# Altium PCB Jukebox_old.PCBDOC (part 1 of 3)
Units mil, origin at the board's own origin, x right, y up, seen from the top; angles counter-clockwise.
Board outline 8310.03 x 5810.03 mil, 2 copper layers (Top Layer, Bottom Layer); 157 components, 236 nets, 1178 pads, 372 vias.
Unrouted connection lines stored in the file: 26.
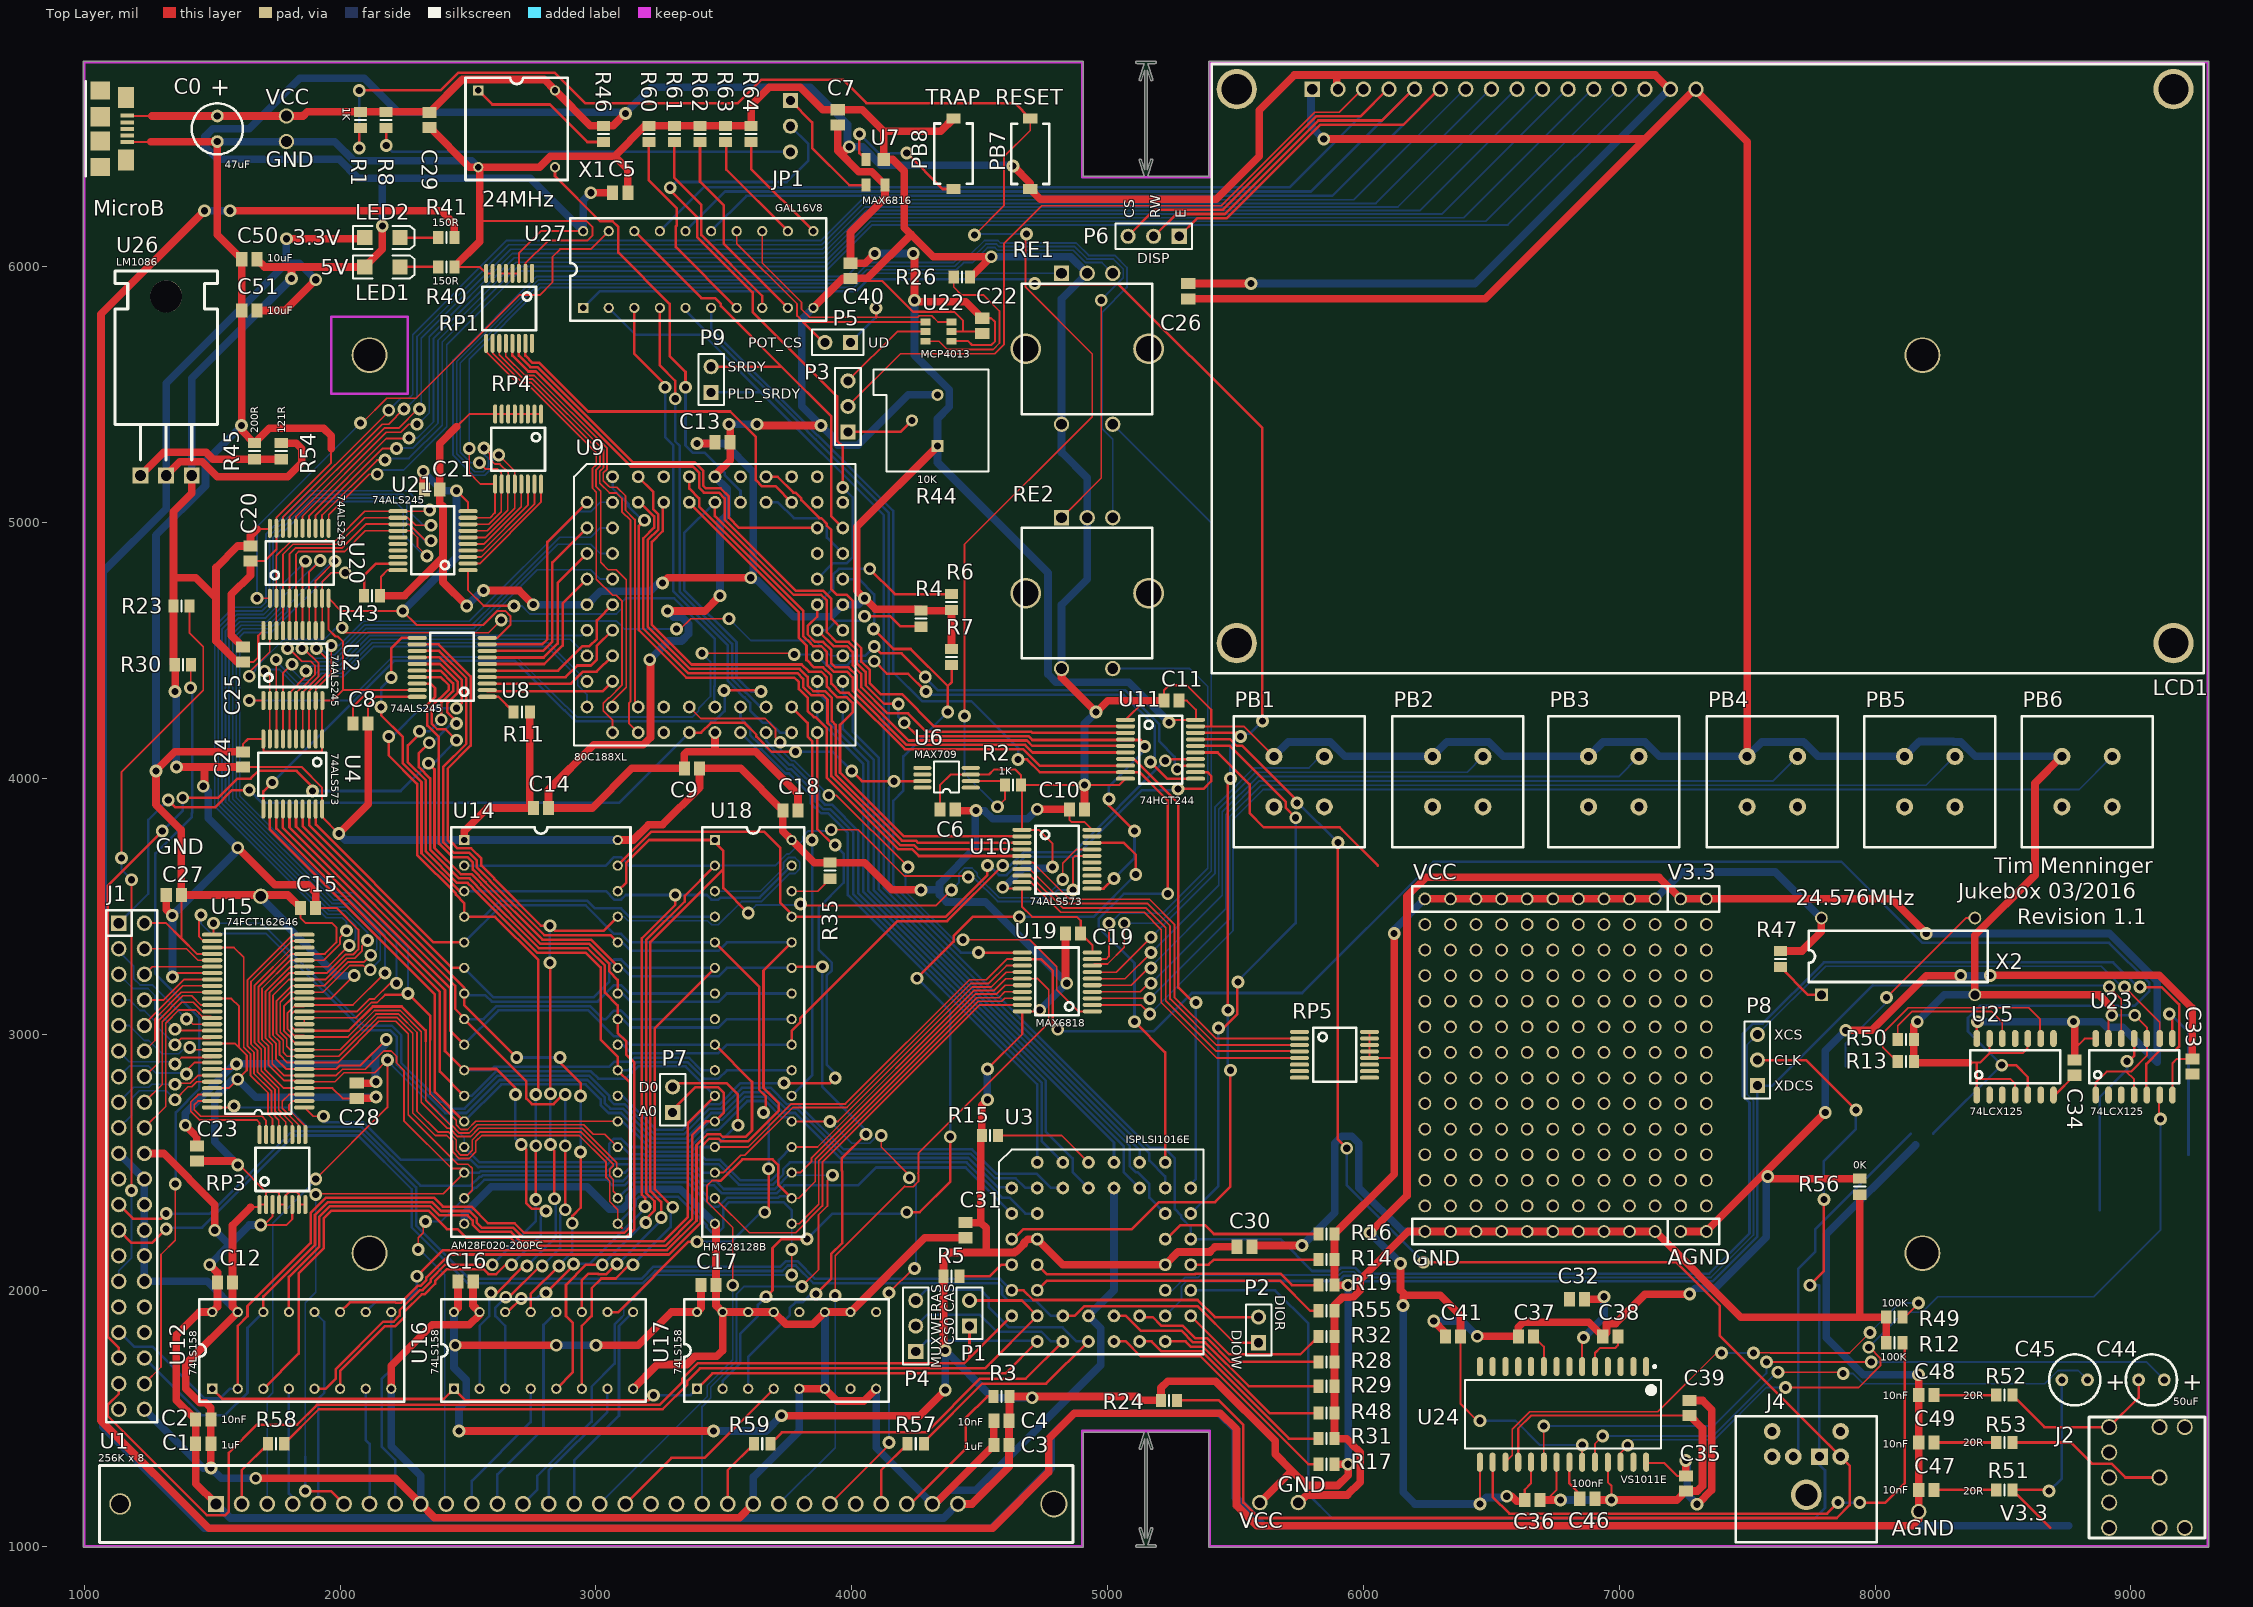
[diagram p0: Top Layer view]
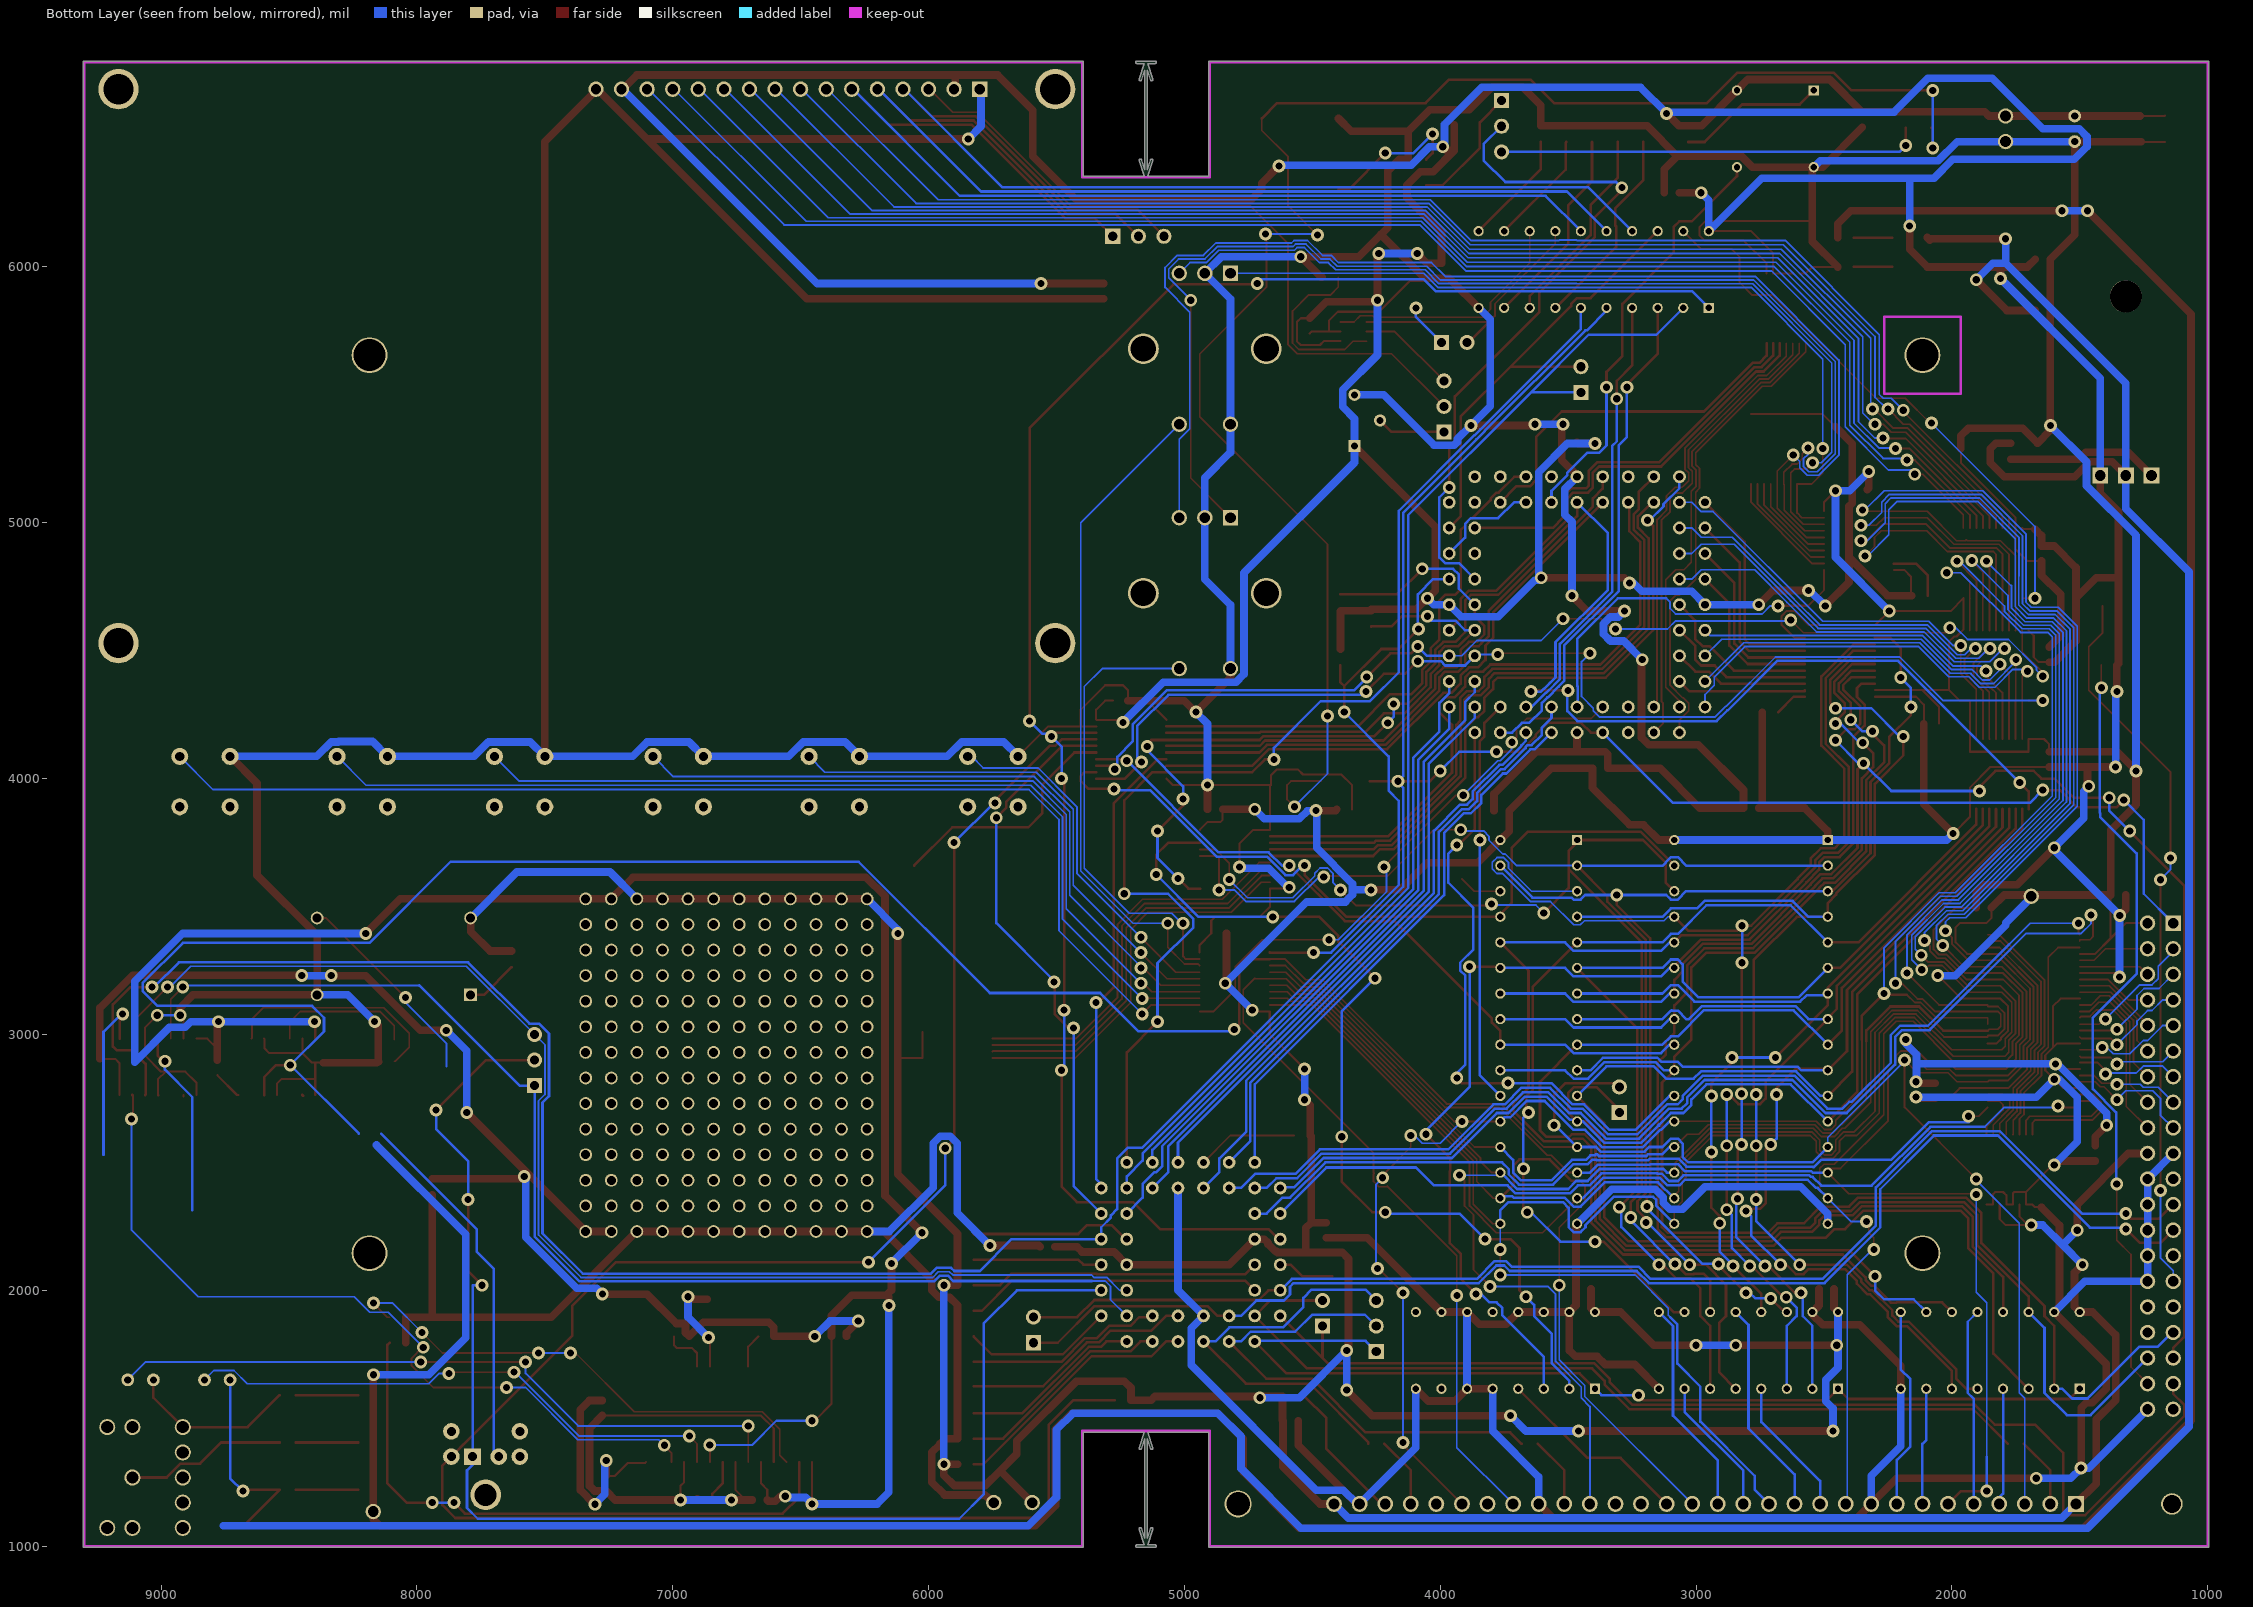
[diagram p1: Bottom Layer view, seen from below]

## Layer stack, top to bottom
Top Solder: solder mask 0.4, Solder Resist, Dk 3.5
Top Layer: signal copper 1.4
Dielectric1: dielectric 12.6, FR-4, Dk 4.8
Bottom Layer: signal copper 1.4
Bottom Solder: solder mask 0.4, Solder Resist, Dk 3.5

## Board outline
1000,994.99 cw(c1000,1000) 994.99,1000 994.99,6800 cw(c1000,6800) 1000,6805.02 4900,6805.02 cw(c4900,6800) 4905.02,6800 4905.02,6355.02 5143.04,6355.02 5122.95,6415.29 cw(c5127.71,6416.87) 5132.47,6418.46 5144.98,6380.9 5144.98,6769.1 5132.47,6731.54 cw(c5127.71,6733.13) 5122.95,6734.71 5143.04,6794.98 5115,6794.98 cw(c5115,6800) 5115,6805.02 5185,6805.02 cw(c5185,6800) 5190.02,6800 cw(c5185,6800) 5185,6794.98 5156.96,6794.98 5177.05,6734.71 cw(c5172.29,6733.13) 5177.31,6733.13 cw(c5172.29,6733.13) 5167.53,6731.54 5155.02,6769.1 5155.02,6380.9 5167.53,6418.46 cw(c5172.29,6416.87) 5177.31,6416.87 cw(c5172.29,6416.87) 5177.05,6415.29 5156.96,6355.02 5394.98,6355.02 5394.98,6800 cw(c5400,6800) 5400,6805.02 9300,6805.02 cw(c9300,6800) 9305.01,6800 9305.01,1000 cw(c9300,1000) 9300,994.99 5400,994.99 cw(c5400,1000) 5394.98,1000 5394.98,1444.98 5156.96,1444.98 5177.05,1384.71 cw(c5172.29,1383.13) 5177.31,1383.13 cw(c5172.29,1383.13) 5167.53,1381.54 5155.02,1419.1 5155.02,1030.9 5167.53,1068.46 cw(c5172.29,1066.87) 5177.31,1066.87 cw(c5172.29,1066.87) 5177.05,1065.29 5156.96,1005.01 5185,1005.01 cw(c5185,1000) 5190.02,1000 cw(c5185,1000) 5185,994.99 5115,994.99 cw(c5115,1000) 5115,1005.01 5143.04,1005.01 5122.95,1065.29 cw(c5127.71,1066.87) 5132.47,1068.46 5144.98,1030.9 5144.98,1419.1 5132.47,1381.54 cw(c5127.71,1383.13) 5122.95,1384.71 5143.04,1444.98 4905.02,1444.98 4905.02,1000 cw(c4900,1000) 4900,994.99

## Design rules (kind name [scope] priority, off if disabled: settings)
Clearance Clearance_11 [HasFootprint('TSSOP56')] p1: gap=7
Clearance Clearance_9 [IsSMTPin vs IsFill] p2: gap=7.9
Clearance Clearance_8 [IsSMTPin vs IsVia] p3: gap=7.9
Clearance Clearance_7 [IsSMTPin vs IsSMTPin] p4: gap=7.8
Clearance Clearance_6 [IsThruPin vs IsFill] p5: gap=7.9
Clearance Clearance_5 [IsThruPin vs IsVia] p6: gap=7.9
Clearance Clearance_4 [IsThruPin vs IsSMTPin] p7: gap=7.8
Clearance Clearance_3 [IsThruPin vs IsThruPin] p8: gap=7.8
Clearance Clearance_2 [IsWire vs IsSMTPin] p9: gap=7.9
Clearance Clearance_1 [IsWire vs IsThruPin] p10: gap=7.9
Clearance [All] p11 off: gap=10
Clearance Clearance_10 [All] p12: gap=7
FabricationTestPointUsage TestPointUsage [All] p1: valid=0 allowmultiple=FALSE
FabricationTestpoint Testpoint [All] p1: side=3 testpointundercomponent=TRUE minsize=40 maxsize=100 preferedsize=60 minholesize=0 maxholesize=40 preferedholesize=32 testpointgrid=1 allowsidetop=TRUE allowsidebottom=TRUE usegrid=TRUE gridtolerance=0.01
HoleSize [All] p1: absolutevalues=TRUE maxlimit=200 minlimit=1 maxpercent=80.000 minpercent=20.000
PlaneClearance [All] p1: clearance=10
PolygonConnect [All] p1: connectstyle=Relief reliefconductorwidth=10 reliefentries=4 polygonreliefangle="90 Angle" airgapwidth=10
RoutingVias [All] p1: holewidth=28 width=50 viastyle="Through Hole" minholewidth=28 minwidth=50 maxholewidth=28 maxwidth=50
SMDNeckDown [All] p1: percent=95.000
SolderMaskExpansion [All] p1: expansion=2
UnpouredPolygon [All] p1: allowunpoured=FALSE
Width [InNet('NetR45_1')] p1: maxlimit=30 minlimit=7 preferedwidth=30 minimp=50.000000 maximp=50.000000 favimp=50.000000
Width "Schematic Width Constraint_3" [InNet('VCC')] p2: maxlimit=30 minlimit=8 preferedwidth=30
Width "Schematic Width Constraint_2" [InNet('GND')] p3: maxlimit=30 minlimit=8 preferedwidth=30
Width "Schematic Width Constraint_1" [InNet('V3.3')] p4: maxlimit=30 minlimit=8 preferedwidth=30
Width "Schematic Width Constraint" [InNet('AGND')] p5: maxlimit=30 minlimit=8 preferedwidth=30
Width Width_1 [All] p6: maxlimit=10 minlimit=7 preferedwidth=10 minimp=50.000000 maximp=50.000000 favimp=50.000000
25 further rules are at their usual default settings.

## Classes and differential pairs
net class D[0..7]: D0 D1 D2 D3 D4 D5 D6 D7
net class A[0..19]: A0 A1 A2 A3 A4 A5 A6 A7 A8 A9 A10 A11 A12 A13 A14 A15 A16 A17 A18 A19
component class "Jukebox Processing": JP1 P1 P2 P4 P5 P6 P7 P8 P9 PB7 PB8 R1 R2 R4 R5 R6 R7 R8 R11 R14 R15 R16 R17 R19 R28 R29 R31 R32 R46 R48 R55 R60 R61 R62 R63 R64 RP1 RP5 U2 U3 U4 U6 U7 U8 U9 U10 U11 U27 X1
component class "Jukebox Power": C0 C1 C2 C3 C4 C5 C6 C7 C8 C9 C10 C11 C12 C13 C14 C15 C16 C17 C18 C19 C20 C21 C22 C23 C24 C25 C26 C27 C28 C29 C30 C31 C32 C33 C34 C35 C36 C37 C38 C39 C40 C41 C50 C51 LED1 LED2 MicroB R40 R41 R45 R54 R56 U26
component class "Jukebox Peripherals": C44 C45 C46 C47 C48 C49 J2 J4 LCD1 P3 PB1 PB2 PB3 PB4 PB5 PB6 R12 R13 R24 R26 R43 R44 R47 R49 R50 R51 R52 R53 RE1 RE2 RP4 U19 U20 U21 U22 U23 U24 U25 X2
component class "Jukebox Memory": J1 R3 R23 R30 R35 R57 R58 R59 RP3 U1 U12 U14 U15 U16 U17 U18

## Components (designator, comment, footprint, x,y, rotation, side; value= is the part's Value field where it differs from the comment)
C0 "Cap Pol3" RB.1/.2 1520,6490 r90 top
C1 "Cap Pol3" C0805 1465,1400 r0 top
C2 "Cap" C0805 1465,1495 r180 top
C3 "Cap Pol3" C0805 4585,1395 r180 top
C4 "Cap" C0805 4585,1490 r0 top
C5 "Cap" C0805 3095,6290 r180 top
C6 "Cap" C0805 4375,3880 r0 top
C7 "Cap" C0805 3945,6585 r270 top
C8 "Cap" C0805 2080,4215 r0 top
C9 "Cap" C0805 3375,4040 r0 top
C10 "Cap" C0805 4880,3880 r180 top
C11 "Cap" C0805 5250,4305 r0 top
C12 "Cap" C0805 1550,2030 r180 top
C13 "Cap" C0805 3495,5315 r180 top
C14 "Cap" C0805 2785,3885 r180 top
C15 "Cap" C0805 1875,3495 r0 top
C16 "Cap" C0805 2490.96,2035 r180 top
C17 "Cap" C0805 3440,2020 r180 top
C18 "Cap" C0805 3760,3875 r180 top
C19 "Cap" C0805 4865,3395 r180 top
C20 "Cap" C0805 1650,4880 r90 top
C21 "Cap" C0805 2360,5130 r0 top
C22 "Cap" C0805 4510,5770 r90 top
C23 "Cap" C0805 1440,2535 r90 top
C24 "Cap" C0805 1620,4075 r270 top
C25 "Cap" C0805 1620,4485 r270 top
C26 "Cap" C0805 5315,5905 r90 top
C27 "Cap" C0805 1350,3545 r180 top
C28 "Cap" C0805 2065,2780 r90 top
C29 "Cap" C0805 2350,6575 r90 top
C30 "Cap" C0805 5535,2170 r180 top
C31 "Cap" C0805 4445,2235 r90 top
C32 "Cap" C0805 6835,1965 r180 top
C33 "Cap" C0805 9240,2875 r270 top
C34 "Cap" C0805 8780,2870 r90 top
C35 "Cap" C0805 7260,1245 r90 top
C36 "Cap" C0805 6660,1180 r180 top
C37 "Cap" C0805 6635,1820 r0 top
C38 "Cap" C0805 6965,1820 r0 top
C39 "Cap" C0805 7275,1540 r90 top
C40 "Cap" C0805 3995,5985 r90 top
C41 "Cap" C0805 6350,1820 r0 top
C44 "Cap Pol3" RB.1/.2 9030,1650 r0 top
C45 "Cap Pol3" RB.1/.2 8730,1650 r0 top
C46 "Cap" C0805 6875,1185 r0 top
C47 "Cap" C0805 8200,1220 r180 top
C48 "Cap" C0805 8200,1590 r180 top
C49 "Cap" C0805 8200,1405 r180 top
C50 "Cap Pol3" C0805 1645,6030 r180 top
C51 "Cap Pol3" C0805 1645,5830 r180 top
J1 "IDE40" SIP2X20 1135,3435 r270 top
J2 "PHONEJACK STEREO SW" SJ1-352 8915,1465 r0 top
J4 "CON_MP3" MDIN6 7865,1350 r180 top
JP1 "3P_JP" HDR1X3 3760,6650 r270 top
LCD1 "NHD-0420DZ-FSW-FBW" 20x4Disp 5800,6695 r0 top
LED1 "5V PWR" 3.2X1.6X1.1 2165,6000 r0 top
LED2 "3.3V PWR" 3.2X1.6X1.1 2165,6115 r0 top
MicroB "Micro B" 10118192 1025,6725 r270 top
P1 "Header 2" HDR1X2 4460,1860 r90 top
P2 "Header 2" HDR1X2 5590,1795 r90 top
P3 "Header 3" HDR1X3 3985,5355 r90 top
P4 "Header 3" HDR1X3 4250,1760 r90 top
P5 "Header 2" HDR1X2 3995,5705 r180 top
P6 "Header 3" HDR1X3 5280,6120 r180 top
P7 "Header 2" HDR1X2 3300,2695 r90 top
P8 "Header 3" HDR1X3 7540,2800 r90 top
P9 "Header 2" HDR1X2 3450,5510 r90 top
PB1 "SW-PB" PB_EG4791 5650,3890 r0 top
PB2 "SW-PB" PB_EG4791 6270,3890 r0 top
PB3 "SW-PB" PB_EG4791 6880,3890 r0 top
PB4 "SW-PB" PB_EG4791 7500,3890 r0 top
PB5 "SW-PB" PB_EG4791 8115,3890 r0 top
PB6 "SW-PB" PB_EG4791 8730,3890 r0 top
PB7 "SWITCH-PBNC" KSR_PB_NC 4725,6285 r90 top
PB8 "SW-PB" KSR_PB_NC 4370,6600 r270 top
R1 "Res1" 6-0805_L 2080,6575 r270 top
R2 "Res1" 6-0805_L 4630,3975 r0 top
R3 "Res1" 6-0805_L 4585,1585 r0 top
R4 "Res1" 6-0805_L 4270,4625 r90 top
R5 "Res1" 6-0805_L 4390,2055 r0 top
R6 "Res1" 6-0805_L 4390,4690 r270 top
R7 "Res1" 6-0805_L 4390,4475 r90 top
R8 "Res1" 6-0805_L 2180,6575 r90 top
R11 "Res1" 6-0805_L 2710,4260 r180 top
R12 "Res1" 6-0805_L 8075,1795 r0 top
R13 "Res1" 6-0805_L 8120,2895 r180 top
R14 "Res1" 6-0805_L 5855,2120 r180 top
R15 "Res1" 6-0805_L 4540,2605 r0 top
R16 "Res1" 6-0805_L 5855,2220 r180 top
R17 "Res1" 6-0805_L 5855,1320 r180 top
R19 "Res1" 6-0805_L 5855,2020 r180 top
R23 "Res1" 6-0805_L 1380,4675 r180 top
R24 "Res1" 6-0805_L 5240,1570 r0 top
R26 "Res1" 6-0805_L 4430,5960 r0 top
R28 "Res1" 6-0805_L 5855,1720 r0 top
R29 "Res1" 6-0805_L 5855,1625 r0 top
R30 "Res1" 6-0805_L 1385,4445 r180 top
R31 "Res1" 6-0805_L 5855,1420 r0 top
R32 "Res1" 6-0805_L 5855,1820 r0 top
R35 "Res1" 6-0805_L 3915,3640 r90 top
R40 "Res1" 6-0805_L 2415,6000 r180 top
R41 "Res1" 6-0805_L 2415,6115 r180 top
R43 "Res1" 6-0805_L 2125,4715 r180 top
R44 "RPot" VR4 4285,5400 r90 top
R45 "Res1" 6-0805_L 1665,5280 r90 top
R46 "Res1" 6-0805_L 3030,6520 r270 top
R47 "Res1" 6-0805_L 7630,3295 r270 top
R48 "Res1" 6-0805_L 5855,1520 r0 top
R49 "Res1" 6-0805_L 8075,1895 r0 top
R50 "Res1" 6-0805_L 8120,2980 r180 top
R51 "Res1" 6-0805_L 8505,1220 r0 top
R52 "Res1" 6-0805_L 8505,1590 r0 top
R53 "Res1" 6-0805_L 8505,1405 r0 top
R54 "Res1" 6-0805_L 1770,5280 r90 top
R55 "Res1" 6-0805_L 5855,1920 r0 top
R56 "Res1" 6-0805_L 7940,2405 r270 top
R57 "Res1" 6-0805_L 4250,1400 r0 top
R58 "Res1" 6-0805_L 1750,1400 r0 top
R59 "Res1" 6-0805_L 3650,1400 r0 top
R60 "Res1" 6-0805_L 3206.65,6520 r270 top
R61 "Res1" 6-0805_L 3306.65,6520 r270 top
R62 "Res1" 6-0805_L 3406.65,6520 r270 top
R63 "Res1" 6-0805_L 3506.65,6520 r90 top
R64 "Res1" 6-0805_L 3606.65,6520 r90 top
RE1 "SW-ROTARY&PB" ROTENCPB 4820,5975 r0 top
RE2 "SW-ROTARY&PB" ROTENCPB 4820,5020 r0 top
RP1 "10K" SSOP16 2750,5975 r180 top
RP3 "10K" SSOP16 1685,2335 r0 top
RP4 "10K" SSOP16 2785,5425 r180 top
RP5 "10K" SSOP16 5750,3010 r270 top
U1 "DRAM256KX9" SIMM30 1515,1165 r0 top
U2 "74ALS245" SSOP20 1700,4305 r0 top
U3 "ISPLSI1016E" PLCCS44 4625,2500 r0 top
U4 "74ALS573" SSOP20 1930,4155 r180 top
U6 "MAX709" UMAX8 4465,3965 r180 top
U7 "MAX6816" SOT-143 4125,6420 r180 top
U8 "74ALS245" SSOP20 2575,4320 r90 top
U9 "80C188XL" PLCCS68I 2965,5180 r0 top
U10 "74ALS573" SSOP20 4665,3800 r270 top
U11 "74HCT244" SSOP20 5070,4230 r270 top
U12 "74LS158" DIPS16 1500,1615 r90 top
U14 "AM28F020-200PC" DIPS32 2485,3760 r0 top
U15 "74FCT162646" SSOP56 1860,2715 r180 top
U16 "74LS158" DIPS16 2445,1615 r90 top
U17 "74LS158" DIPS16 3395,1615 r90 top
U18 "HM628128B" DIPS32.300 3465,3760 r0 top
U19 "MAX6818" SSOP20 4940,3090 r90 top
U20 "74ALS245" SSOP20 1725,4705 r0 top
U21 "74ALS245" SSOP20 2500,4815 r90 top
U22 "MCP4013" SOT-23-6 4390,5710 r90 top
U23 "74LCX125" "SOIC 14" 9175,2730 r90 top
U24 "VS1011E" SOP127P1030X265-28N 6780,1515 r270 top
U25 "74LCX125" "SOIC 14" 8710,2730 r90 top
U26 "LM1086" TO-220 1220,5185 r0 top
U27 "GAL16V8" DIPS20 2950,5840 r90 top
X1 "OSCOE" DIPS8-4 2540,6690 r0 top
X2 "OSCOE" DIP14-4 7790,3155 r90 top

## Footprints (in the part's own frame and the unit in brackets; to place one, negate y for a bottom-side part, rotate by r counter-clockwise, add the part's x,y. Pads: shape width x height; smd on the part's side, far side on the other; paste and mask are expansions set on the pad)
3.2X1.6X1.1 [mm] "SMT LED; 2 Flat Leads"
  rect 1.5x1.5 smd: 1(-1.75,0) 2(1.75,0)
  silkscreen extent -2.9,-1.15 3.2,1.15
6-0805_L [mm] "Chip Resistor, Body 2.0x1.2mm, IPC High Density"
  rect 1x1.3 smd: 1(-0.8,0) 2(0.8,0)
  silkscreen extent 0,-0.55 0,0.55, body extent -1.07,-0.7 1.07,0.7, height 0.7
20x4Disp [mil]
  round 157.48 hole 118.11: 0(-295.28,-2165.35) 0(-295.28,0) 0(3366.14,-2165.35) 0(3366.14,0)
  rect 60x60 hole 40: 1(0,0)
  round 60 hole 40: 2(100,0) 3(200,0) 4(300,0) 5(400,0) 6(500,0) 7(600,0) 8(700,0) 9(800,0) 10(900,0) 11(1000,0) 12(1100,0) 13(1200,0) 14(1300,0) 15(1400,0) 16(1500,0)
  silkscreen extent -394,-2283 3484,98
10118192 [mm] "Micro B USB"
  rect 0.4x1.35 smd: 1(3.4,3.625) 2(4.05,3.625) 3(4.7,3.625) 4(5.35,3.625) 5(6,3.625)
  rect 1.8x1.9 smd: ""(0.9,0.95) ""(8.5,0.95)
  rect 2.1x1.6 smd: ""(1.6,3.5) ""(7.8,3.5)
  rect 1.9x1.9 smd: ""(3.5,0.95) ""(5.9,0.95)
  silkscreen extent 0,-0.5 9.4,-0.5
C0805 [mm] "Chip Capacitor, Body 2.0x1.3mm, IPC High Density"
  rect 1.1x1.4 smd: 1(-0.75,0) 2(0.75,0)
  body extent -1.1,-0.72 1.1,0.72, height 1.4
DIP14-4 [mil]
  rect 50x50 hole 35: 1(0,0)
  round 50 hole 35: 2(0,-600) 3(300,-600) 4(300,0)
  silkscreen extent 50,-650 250,50
DIPS8-4 [mil]
  rect 40x40 hole 25: 1(0,0)
  round 40 hole 25: 2(0,-300) 3(300,-300) 4(300,0)
  silkscreen extent -50,-350 350,50
DIPS16 [mil]
  rect 40x40 hole 25: 1(0,0)
  round 40 hole 25: 2(0,-100) 3(0,-200) 4(0,-300) 5(0,-400) 6(0,-500) 7(0,-600) 8(0,-700) 9(300,-700) 10(300,-600) 11(300,-500) 12(300,-400) 13(300,-300) 14(300,-200) 15(300,-100) 16(300,0)
  silkscreen extent -50,-750 350,50
DIPS20 [mil]
  rect 40x40 hole 25: 1(0,0)
  round 40 hole 25: 2(0,-100) 3(0,-200) 4(0,-300) 5(0,-400) 6(0,-500) 7(0,-600) 8(0,-700) 9(0,-800) 10(0,-900) 11(300,-900) 12(300,-800) 13(300,-700) 14(300,-600) 15(300,-500) 16(300,-400) 17(300,-300) 18(300,-200) 19(300,-100) 20(300,0)
  silkscreen extent -50,-950 350,50
DIPS32 [mil]
  rect 40x40 hole 25: 1(0,0)
  round 40 hole 25: 2(0,-100) 3(0,-200) 4(0,-300) 5(0,-400) 6(0,-500) 7(0,-600) 8(0,-700) 9(0,-800) 10(0,-900) 11(0,-1000) 12(0,-1100) 13(0,-1200) 14(0,-1300) 15(0,-1400) 16(0,-1500) 17(600,-1500) 18(600,-1400) 19(600,-1300) 20(600,-1200) 21(600,-1100) 22(600,-1000) 23(600,-900) 24(600,-800) 25(600,-700) 26(600,-600) 27(600,-500) 28(600,-400) 29(600,-300) 30(600,-200) 31(600,-100) 32(600,0)
  silkscreen extent -50,-1550 650,50
DIPS32.300 [mil]
  rect 40x40 hole 25: 1(0,0)
  round 40 hole 25: 2(0,-100) 3(0,-200) 4(0,-300) 5(0,-400) 6(0,-500) 7(0,-600) 8(0,-700) 9(0,-800) 10(0,-900) 11(0,-1000) 12(0,-1100) 13(0,-1200) 14(0,-1300) 15(0,-1400) 16(0,-1500) 17(300,-1500) 18(300,-1400) 19(300,-1300) 20(300,-1200) 21(300,-1100) 22(300,-1000) 23(300,-900) 24(300,-800) 25(300,-700) 26(300,-600) 27(300,-500) 28(300,-400) 29(300,-300) 30(300,-200) 31(300,-100) 32(300,0)
  silkscreen extent -50,-1550 350,50
HDR1X2 [mm] "Connector; Header; 2 Position"
  rect 1.5x1.5 hole 0.9: 1(0,0)
  round 1.5 hole 0.9: 2(2.54,0)
  silkscreen extent -1.27,-1.27 3.81,1.27
HDR1X3 [mm] "Connector; Header; 3 Position"
  rect 1.5x1.5 hole 0.9: 1(0,0)
  round 1.5 hole 0.9: 2(2.54,0) 3(5.08,0)
KSR_PB_NC [mm] "Pushbutton SPST NC"
  rect 1x1.4 smd: 1(0.5,0.7) 2(7.5,0.7)
  silkscreen extent 1,-1.2 7,2.6
MDIN6 [mil]
  rect 65x65 hole 35: 1(82.68,0)
  round 65 hole 35: 2(185.04,0) 3(0,0) 4(267.72,0) 5(0,-98.43) 6(267.72,-98.43)
  round 120 hole 86: A(133.86,149.61)
  silkscreen extent -142,-157 409,335
PB_EG4791 [mm]
  round 1.7 hole 0.9: 1(0,5) 2(5,5) 3(0,0) 4(5,0)
  silkscreen extent -4,-4 9,9
PLCCS44 [mil]
  round 50 hole 28: 1(400,-100) 2(300,0) 3(300,-100) 4(200,0) 5(200,-100) 6(100,0) 7(0,-100) 8(100,-100) 9(0,-200) 10(100,-200) 11(0,-300) 12(100,-300) 13(0,-400) 14(100,-400) 15(0,-500) 16(100,-500) 17(0,-600) 18(100,-700) 19(100,-600) 20(200,-700) 21(200,-600) 22(300,-700) 23(300,-600) 24(400,-700) 25(400,-600) 26(500,-700) 27(500,-600) 28(600,-700) 29(700,-600) 30(600,-600) 31(700,-500) 32(600,-500) 33(700,-400) 34(600,-400) 35(700,-300) 36(600,-300) 37(700,-200) 38(600,-200) 39(700,-100) 40(600,0) 41(600,-100) 42(500,0) 43(500,-100) 44(400,0)
  silkscreen extent -50,-750 750,50
PLCCS68I [mil]
  round 50 hole 30: 1(0,-100) 2(100,-100) 3(0,-200) 4(100,-200) 5(0,-300) 6(100,-300) 7(0,-400) 8(100,-400) 9(0,-500) 10(100,-500) 11(0,-600) 12(100,-600) 13(0,-700) 14(100,-700) 15(0,-800) 16(100,-800) 17(0,-900) 18(100,-1000) 19(100,-900) 20(200,-1000) 21(200,-900) 22(300,-1000) 23(300,-900) 24(400,-1000) 25(400,-900) 26(500,-1000) 27(500,-900) 28(600,-1000) 29(600,-900) 30(700,-1000) 31(700,-900) 32(800,-1000) 33(800,-900) 34(900,-1000) 35(1000,-900) 36(900,-900) 37(1000,-800) 38(900,-800) 39(1000,-700) 40(900,-700) 41(1000,-600) 42(900,-600) 43(1000,-500) 44(900,-500) 45(1000,-400) 46(900,-400) 47(1000,-300) 48(900,-300) 49(1000,-200) 50(900,-200) 51(1000,-100) 52(900,0) 53(900,-100) 54(800,0) 55(800,-100) 56(700,0) 57(700,-100) 58(600,0) 59(600,-100) 60(500,0) 61(500,-100) 62(400,0) 63(400,-100) 64(300,0) 65(300,-100) 66(200,0) 67(200,-100) 68(100,0)
  silkscreen extent -50,-1050 1050,50
RB.1/.2 [mil]
  round 50 hole 28: 1(100,0) 2(0,0)
  silkscreen extent -50,-100 150,100
ROTENCPB [mil]
  rect 60x60 hole 42: 1(0,0)
  round 60 hole 42: 2(100,0) 3(200,0) 4(200,-590) 5(0,-590)
  round 120 hole 100: ""(-140,-295) ""(340,-295)
  silkscreen extent -155,-550 355,-40
SIMM30 [mil]
  rect 62x62 hole 42: 1(0,0)
  round 62 hole 42: 2(100,0) 3(200,0) 4(300,0) 5(400,0) 6(500,0) 7(600,0) 8(700,0) 9(800,0) 10(900,0) 11(1000,0) 12(1100,0) 13(1200,0) 14(1300,0) 15(1400,0) 16(1500,0) 17(1600,0) 18(1700,0) 19(1800,0) 20(1900,0) 21(2000,0) 22(2100,0) 23(2200,0) 24(2300,0) 25(2400,0) 26(2500,0) 27(2600,0) 28(2700,0) 29(2800,0) 30(2900,0)
  round 84 hole 70: ""(-375,0)
  round 106 hole 92: ""(3275,0)
  silkscreen extent -455,-150 3350,150
SIP2X20 [mil]
  rect 60x60 hole 40: 1(0,0)
  round 60 hole 40: 2(0,100) 3(100,0) 4(100,100) 5(200,0) 6(200,100) 7(300,0) 8(300,100) 9(400,0) 10(400,100) 11(500,0) 12(500,100) 13(600,0) 14(600,100) 15(700,0) 16(700,100) 17(800,0) 18(800,100) 19(900,0) 20(900,100) 21(1000,0) 22(1000,100) 23(1100,0) 24(1100,100) 25(1200,0) 26(1200,100) 27(1300,0) 28(1300,100) 29(1400,0) 30(1400,100) 31(1500,0) 32(1500,100) 33(1600,0) 34(1600,100) 35(1700,0) 36(1700,100) 37(1800,0) 38(1800,100) 39(1900,0) 40(1900,100)
  silkscreen extent -50,-50 1950,150
SJ1-352 [mm]
  round 1.6 hole 1.2: A(0,-10) B(0,-7.5) C(0,-2.5) D(0,0) E(5,-5) ""(0,-5) ""(5,-10) ""(5,0) ""(7.5,-10) ""(7.5,0)
  silkscreen extent -2,-11 9.5,1
"SOIC 14" [mm]
  oval 1.7x0.65 smd: 1(0.85,7.945) 2(0.85,6.675) 3(0.85,5.405) 4(0.85,4.135) 5(0.85,2.865) 6(0.85,1.595) 7(0.85,0.325) 8(6.45,0.325) 9(6.45,1.595) 10(6.45,2.865) 11(6.45,4.135) 12(6.45,5.405) 13(6.45,6.675) 14(6.45,7.945)
  silkscreen extent 2,-0.33 5.3,8.6
SOP127P1030X265-28N [mm] "SOP, 28-Leads, Body 19.30x7.50mm, Pitch 1.27mm, IPC Medium Density"
  oval 1.9x0.6 smd: 1(-4.75,8.255) 2(-4.75,6.985) 3(-4.75,5.715) 4(-4.75,4.445) 5(-4.75,3.175) 6(-4.75,1.905) 7(-4.75,0.635) 8(-4.75,-0.635) 9(-4.75,-1.905) 10(-4.75,-3.175) 11(-4.75,-4.445) 12(-4.75,-5.715) 13(-4.75,-6.985) 14(-4.75,-8.255) 15(4.75,-8.255) 16(4.75,-6.985) 17(4.75,-5.715) 18(4.75,-4.445) 19(4.75,-3.175) 20(4.75,-1.905) 21(4.75,-0.635) 22(4.75,0.635) 23(4.75,1.905) 24(4.75,3.175) 25(4.75,4.445) 26(4.75,5.715) 27(4.75,6.985) 28(4.75,8.255)
  silkscreen extent -4.87,-9.75 3.4,9.75, body extent -3.8,-9.75 3.8,9.75, height 2.65
SOT-23-6 [mil]
  rect 26x40 smd: 1(0,0) 2(37.5,0) 3(75,0) 4(75,102) 5(37.5,102) 6(0,102)
SOT-143 [mil]
  rect 50x50 smd: 1(0,0)
  rect 35x50 smd: 2(70,0) 3(70,100) 4(-5,100)
SSOP16 [mm]
  oval 0.4x1.9 smd: 1(0,0) 2(0.65,0) 3(1.3,0) 4(1.95,0) 5(2.6,0) 6(3.25,0) 7(3.9,0) 8(4.55,0) 9(4.55,6.95) 10(3.9,6.95) 11(3.25,6.95) 12(2.6,6.95) 13(1.95,6.95) 14(1.3,6.95) 15(0.65,6.95) 16(0,6.95)
  silkscreen extent -0.4,1.35 4.95,5.65
SSOP20 [mm]
  oval 0.4x1.9 smd: 1(0,0) 2(0.65,0) 3(1.3,0) 4(1.95,0) 5(2.6,0) 6(3.25,0) 7(3.9,0) 8(4.55,0) 9(5.2,0) 10(5.85,0) 11(5.85,6.95) 12(5.2,6.95) 13(4.55,6.95) 14(3.9,6.95) 15(3.25,6.95) 16(2.6,6.95) 17(1.95,6.95) 18(1.3,6.95) 19(0.65,6.95) 20(0,6.95)
  silkscreen extent -0.4,1.35 6.35,5.65
SSOP56 [mil]
  oval 80x16 smd: 1(0,0) 2(0,-25) 3(0,-50) 4(0,-75) 5(0,-100) 6(0,-125) 7(0,-150) 8(0,-175) 9(0,-200) 10(0,-225) 11(0,-250) 12(0,-275) 13(0,-300) 14(0,-325) 15(0,-350) 16(0,-375) 17(0,-400) 18(0,-425) 19(0,-450) 20(0,-475) 21(0,-500) 22(0,-525) 23(0,-550) 24(0,-575) 25(0,-600) 26(0,-625) 27(0,-650) 28(0,-675) 29(360,-675) 30(360,-650) 31(360,-625) 32(360,-600) 33(360,-575) 34(360,-550) 35(360,-525) 36(360,-500) 37(360,-475) 38(360,-450) 39(360,-425) 40(360,-400) 41(360,-375) 42(360,-350) 43(360,-325) 44(360,-300) 45(360,-275) 46(360,-250) 47(360,-225) 48(360,-200) 49(360,-175) 50(360,-150) 51(360,-125) 52(360,-100) 53(360,-75) 54(360,-50) 55(360,-25) 56(360,0)
  silkscreen extent 50,-700 310,25
TO-220 [mil]
  round 125 hole 125: 0(100,700)
  rect 62x62 hole 42: 1(0,0) 2(100,0) 3(200,0)
  silkscreen extent -100,60 300,800
UMAX8 [mm]
  oval 1.8x0.4 smd: 1(0,0) 2(0,-0.65) 3(0,-1.3) 4(0,-1.95) 5(4.8,-1.95) 6(4.8,-1.3) 7(4.8,-0.65) 8(4.8,0)
  silkscreen extent 1.15,-2.6 3.65,0.5
VR4 [mm] "Thru-Hole; 3 Leads"
  rect 1.2x1.2 hole 0.7: 1(-2.54,-1.27)
  round 1.2 hole 0.7: 2(0,1.27) 3(2.54,-1.27)
  silkscreen extent -5.08,-6.35 5.08,5.08

## Part data
C0 C1 C3 C44 C45 C50 C51: "Polarized Capacitor (Surface Mount)"
C2 C4 C5 C6 C7 C8 C9 C10 C11 C12 C13 C14 C15 C16 C17 C18 C19 C20 C21 C22 C23 C24 C25 C26 C27 C28 C29 C30 C31 C32 C33 C34 C35 C36 C37 C38 C39 C40 C41 C46 C47 C48 C49: "Capacitor"
J1: "40-Pin IDE Connector"
J2: "3.5mm Stereo Jack with Switches"
J4: "MP3 Connector"
LCD1: library part LCDBL16PIN, "Single E LCD with Backlight"
LED1 LED2: library part LED2, "Typical RED, GREEN, YELLOW, AMBER GaAs LED"
MicroB: library part "10118192 Micro B USB"
P1 P2 P5 P7 P9: "Header, 2-Pin"
P3 P4 P6 P8: "Header, 3-Pin"
PB1 PB2 PB3 PB4 PB5 PB6 PB8: "Switch"
PB7: "Normally Closed Pushbutton Switch"
R1 R2 R3 R4 R5 R6 R7 R8 R11 R12 R13 R14 R15 R16 R17 R19 R23 R24 R26 R28 R29 R30 R31 R32 R35 R40 R41 R43 R45 R46 R47 R48 R49 R50 R51 R52 R53 R54 R55 R56 R57 R58 R59 R60 R61 R62 R63 R64: "Resistor"
R44: "Potentiometer"
RE1 RE2: "Rotary Encoder with Built-In Push Button"
RP1 RP3 RP4 RP5: library part RPACK8, "Resistor Pack - 8 Resistors"
U1: "256K x 9 DRAM SIMM"
U2 U8 U20 U21: "Octal Bus Transceiver"
U3: library part ISPLSI1016, "In-System Programmable High Density CPLD"
U4 U10: "Octal Transparent Latch"
U6: "Maxim Power-On Reset"
U7: "Single Switch Debouncer"
U9: "Intel 80188 Microprocessor"
U11: "Octal Buffer"
U14: library part UNIROM, "Universal EPROM/EEROM Socket"
U15: library part 74FCT16646, "16-Bit Bus Transceiver/Register"
U18: library part UNIRAM, "Universal RAM Socket"
U19: "Octal Switch Debouncer"
U26: "1.5A Low Dropout Positive Regulator"
X1 X2: "Oscillator with Active High Output Enable"

## Free pads (board coordinates)
  round 60 hole 42: 0(1690,3540) 0(1790,6490) 0(1790,6590) 0(5595,1170) 0(5745,1170) 0(8170.47,1135)
  round 140 hole 125: 1(2115,2145) 2(2115,5655) 3(8185,2145) 4(8185,5655)
  round 50 hole 35: 26(6240,2230) 26(6340,2230) 26(6440,2230) 26(6540,2230) 26(6640,2230) 26(6740,2230) 26(6840,2230) 26(6940,2230) 26(7040,2230) 26(7140,2230) 26(7240,2230) 26(7340,2230) 27(6240,2330) 27(6340,2330) 27(6440,2330) 27(6540,2330) 27(6640,2330) 27(6740,2330) 27(6840,2330) 27(6940,2330) 27(7040,2330) 27(7140,2330) 27(7240,2330) 27(7340,2330) 28(6240,2430) 28(6340,2430) 28(6440,2430) 28(6540,2430) 28(6640,2430) 28(6740,2430) 28(6840,2430) 28(6940,2430) 28(7040,2430) 28(7140,2430) 28(7240,2430) 28(7340,2430) 29(6240,2530) 29(6340,2530) 29(6440,2530) 29(6540,2530) 29(6640,2530) 29(6740,2530) 29(6840,2530) 29(6940,2530) 29(7040,2530) 29(7140,2530) 29(7240,2530) 29(7340,2530) 30(6240,2630) 30(6340,2630) 30(6440,2630) 30(6540,2630) 30(6640,2630) 30(6740,2630) 30(6840,2630) 30(6940,2630) 30(7040,2630) 30(7140,2630) 30(7240,2630) 30(7340,2630) 31(6240,2730) 31(6340,2730) 31(6440,2730) 31(6540,2730) 31(6640,2730) 31(6740,2730) 31(6840,2730) 31(6940,2730) 31(7040,2730) 31(7140,2730) 31(7240,2730) 31(7340,2730) 32(6240,2830) 32(6340,2830) 32(6440,2830) 32(6540,2830) 32(6640,2830) 32(6740,2830) 32(6840,2830) 32(6940,2830) 32(7040,2830) 32(7140,2830) 32(7240,2830) 32(7340,2830) 33(6240,2930) 33(6340,2930) 33(6440,2930) 33(6540,2930) 33(6640,2930) 33(6740,2930) 33(6840,2930) 33(6940,2930) 33(7040,2930) 33(7140,2930) 33(7240,2930) 33(7340,2930) 34(6240,3030) 34(6340,3030) 34(6440,3030) 34(6540,3030) 34(6640,3030) 34(6740,3030) 34(6840,3030) 34(6940,3030) 34(7040,3030) 34(7140,3030) 34(7240,3030) 34(7340,3030) 35(6240,3130) 35(6340,3130) 35(6440,3130) 35(6540,3130) 35(6640,3130) 35(6740,3130) 35(6840,3130) 35(6940,3130) 35(7040,3130) 35(7140,3130) 35(7240,3130) 35(7340,3130) 36(6240,3230) 36(6340,3230) 36(6440,3230) 36(6540,3230) 36(6640,3230) 36(6740,3230) 36(6840,3230) 36(6940,3230) 36(7040,3230) 36(7140,3230) 36(7240,3230) 36(7340,3230) 37(6240,3330) 37(6340,3330) 37(6440,3330) 37(6540,3330) 37(6640,3330) 37(6740,3330) 37(6840,3330) 37(6940,3330) 37(7040,3330) 37(7140,3330) 37(7240,3330) 37(7340,3330) 38(6240,3430) 38(6340,3430) 38(6440,3430) 38(6540,3430) 38(6640,3430) 38(6740,3430) 38(6840,3430) 38(6940,3430) 38(7040,3430) 38(7140,3430) 38(7240,3430) 38(7340,3430) 39(6240,3530) 39(6340,3530) 39(6440,3530) 39(6540,3530) 39(6640,3530) 39(6740,3530) 39(6840,3530) 39(6940,3530) 39(7040,3530) 39(7140,3530) 39(7240,3530) 39(7340,3530)

## Via types
v1: diameter 50, hole 28, Top Layer to Bottom Layer, 372 vias

## Nets (pads, with @x,y where several pads share a name; then routed paths per layer and width w, separated by ;. In a path a pad name is that pad's centre, name@x,y a point inside that pad or via, vN(x,y) a via of type N, cw(c..) or ccw(c..) an arc to the next point about the centre after c; other vN are vias at no path point)
A0: P7.1 U3.7 U4.12 U12.3 U14.12 U18.12 | length 7205.6
  Top Layer w10: U12.3@1700,1615 1837.9,1752.9 1837.9,2065.78 1935.91,2163.78 1935.91,2280.91 1966,2311 2345.92,2311 2417.68,2239.24 2459.24,2239.24 2493.47,2205 2666.92,2205 2697.92,2174 3271.12,2174 3376,2278.88 3376,2606 3430,2660 U18.12@3465,2660 3500,2695 3500,2771.53 3478.63,2792.9 3387.9,2792.9 3300,2705 P7.1@3300,2695 ; U4.12@1725.28,3881.38 1725.28,3801.73 2370,3157.01 2370,2775 U14.12@2485,2660
  Bottom Layer w10: U14.12@2485,2660 2630,2805 2959.27,2805 3018.1,2746.17 3018.1,2723.82 3049.02,2692.9 3098.63,2692.9 3143.18,2648.34 3143.18,2644.1 3147.43,2644.1 3215.53,2576 3358.51,2576 3442.51,2660 U18.12@3465,2660 3471,2666 3493.49,2666 3584.49,2757 3669.37,2757 3733.27,2693.1 3778.43,2693.1 3954.53,2517 4456.08,2517 4571.08,2402 4623,2402 U3.7@4625,2400
A1: U4.13 U12.13 U14.11 U18.11 | length 5027.6
  Top Layer w10: U4.13@1750.87,3881.38 1750.87,3804.43 2390,3165.29 2390,2855 U14.11@2485,2760 ; U12.13@1800,1915 1800,2051.92 1918.91,2170.82 1918.91,2287.95 1958.96,2328 2352.96,2328 2388.06,2292.9 2498.63,2292.9 2517.9,2273.63 2517.9,2256.53 2546.43,2228 2667.96,2228 2704.96,2191 3264.08,2191 3359,2285.92 3359,2654 U18.11@3465,2760
  Bottom Layer w10: U14.11@2485,2760 2512.88,2760 2608.88,2856 2980.4,2856 3009.3,2827.1 3117.1,2827.1 3165,2875 3350,2875 U18.11@3465,2760
A2: U4.14 U12.6 U14.10 U18.10 | length 4335
  Top Layer w10: U4.14@1776.46,3881.38 1776.46,3807.12 2410,3173.58 2410,2935 2480,2865 2611,2865 2685,2791 v1(2685,2765) ; U12.6@2000,1615 2000,1685 2175.1,1860.1 2215.67,1860.1 2249.9,1894.33 2249.9,1914.9 2319,1984 2329.41,1984 2371,2025.59 2371,2036 2418,2083 2559.67,2083 2579.67,2063 2610.33,2063 2647.33,2100 v1(2670,2100) ; v1(2708,2569.5) 2728,2549.5 2728,2339.67 2749.67,2318 2797,2318 v1(2805,2310)
  Bottom Layer w10: U14.10@2485,2860 2588.83,2860 2601.83,2873 3051.47,2873 3071.37,2892.9 3134.82,2892.9 3150.92,2909 3364.08,2909 3413.08,2860 U18.10@3465,2860 ; v1(2670,2100) 2785,2215 2785,2290 v1(2805,2310) ; v1(2685,2765) 2685,2592.5 v1(2708,2569.5)
A3: U4.15 U12.10 U14.9 U18.9 | length 4707.8
  Top Layer w10: U4.15@1802.05,3881.38 1802.05,3809.82 2430,3181.86 2430,3015 U14.9@2485,2960 ; v1(2300,2055) 2402,2157 3278.17,2157 3393,2271.83 3393,2567.04 3435.86,2609.9 3485.67,2609.9 3495.57,2600 3585,2600 3610,2625 3610,2815 U18.9@3465,2960
  Bottom Layer w10: U12.10@2100,1915 2150,1965 2265,1965 2300,2000 v1(2300,2055) ; U14.9@2485,2960 2619,3094 2970.27,3094 3071.37,2992.9 3098.63,2992.9 3131.53,2960 U18.9@3465,2960
A4: U4.16 U14.8 U16.3 U18.8 | length 4022.9
  Top Layer w10: U4.16@1827.64,3881.38 1827.64,3812.51 2450,3190.15 2450,3100 2485,3065 U14.8@2485,3060 2728,2817 2728,2749.67 2749.67,2728 2834.33,2728 2871.33,2765 v1(2880,2765) ; v1(2647.55,1972.9) 2660.23,1972.9 2782.33,2095 v1(2790,2095) ; v1(2880,2315) v1(2880,2565)
  Bottom Layer w10: U14.8@2485,3060 2560.96,3060 2611.96,3111 2977.31,3111 3028.31,3060 3038.47,3060 3071.37,3092.9 3092.9,3092.9 3095,3095 3097.1,3092.9 3098.63,3092.9 3131.53,3060 U18.8@3465,3060 ; U16.3@2645,1615 2645,1861.4 2607.1,1899.3 2607.1,1932.45 v1(2647.55,1972.9) ; v1(2790,2095) 2860,2165 2860,2295 v1(2880,2315) ; v1(2880,2565) v1(2880,2765)
A5: U4.17 U14.7 U16.13 U18.7 | length 3630.7
  Top Layer w10: U4.17@1853.23,3881.38 1853.23,3815.2 2485,3183.43 U14.7@2485,3160 2485,3115 v1(2690,2910) ; U16.13@2745,1915 2745,1985 v1(2855,2095) ; v1(2860,2910) 2860,2890 2940,2810 v1(2940,2760) ; v1(2907.61,2262) 2907.61,2290.28 2940,2322.67 v1(2940,2540)
  Bottom Layer w10: U14.7@2485,3160 2492,3153 2567.96,3153 2592.96,3128 3006.47,3128 3071.37,3192.9 3098.63,3192.9 3131.53,3160 U18.7@3465,3160 ; v1(2690,2910) v1(2860,2910) ; v1(2855,2095) 2855,2098.33 2907.61,2150.94 v1(2907.61,2262) ; v1(2940,2540) v1(2940,2760)
A6: U4.18 U14.6 U16.6 U18.6 | length 4001.6
  Top Layer w10: U4.18@1878.82,3881.38 1878.82,3817.9 2436.72,3260 U14.6@2485,3260 ; U16.6@2945,1615 2945,1861.4 2982.9,1899.3 2982.9,2007.9 3021,2046 3077.33,2046 3131.33,2100 v1(3145,2100) ; v1(3300,2325) 3230,2395 3230,3025 U18.6@3465,3260
  Bottom Layer w10: U14.6@2485,3260 2600,3145 2990,3145 3052.1,3207.1 3052.1,3273.63 3071.37,3292.9 3098.63,3292.9 3131.53,3260 U18.6@3465,3260 ; v1(3145,2100) 3292,2247 3292,2317 v1(3300,2325)
A7: U4.19 U14.5 U16.10 U18.5 | length 3863.7
  Top Layer w10: U4.19@1904.41,3881.38 1905,3880.79 1905,3820 2365,3360 U14.5@2485,3360 ; U16.10@3045,1915 3087.43,1915 3362.43,2190 v1(3395,2190) ; U18.5@3465,3360 3638,3187 3638,2783.92 3663,2758.92 3663,2703 v1(3655,2695) ; v1(3660,2305) 3675,2320 v1(3675,2475)
  Bottom Layer w10: U14.5@2485,3360 2630,3505 2959.27,3505 3071.37,3392.9 3098.63,3392.9 3131.53,3360 U18.5@3465,3360 ; v1(3395,2190) 3530,2190 3645,2305 v1(3660,2305) ; v1(3655,2695) 3675,2675 v1(3675,2475)
A8: U8.18 U14.27 U17.3 U18.27 | length 4420.3
  Top Layer w10: U8.18@2301.38,4371.18 2302.56,4370 2355,4370 2370.94,4354.06 2370.94,4319.06 2341,4289.12 2341,4207.63 2386,4162.63 2386,3745.92 2438.82,3693.1 2498.43,3693.1 2517.9,3673.63 2517.9,3644.02 2518.02,3643.9 2519.75,3643.9 2568.9,3594.75 2568.9,3593.02 2790.92,3371 2981.12,3371 3085,3267.12 U14.27@3085,3260 ; U18.27@3765,3260 3770,3265 v1(3885,3265) ; v1(3860,1985) 3919.5,2044.5 3919.5,2141.42 3962,2183.92 3962,2465.33 3960,2467.33 3960,2515 v1(4055,2610)
  Bottom Layer w10: U14.27@3085,3260 3103.24,3260 3136.14,3227.1 3478.63,3227.1 3511.53,3260 U18.27@3765,3260 ; U17.3@3595,1615 3595,1740 3757.1,1902.1 3757.1,1930.7 3779.3,1952.9 3807.9,1952.9 3840,1985 v1(3860,1985) ; v1(3885,3265) 3885,2795 4065,2615 4060,2610 v1(4055,2610)
A9: J1.35 U8.17 U14.26 U18.26 | length 6054.2
  Top Layer w10: J1.35@1135,1735 1135,1774.33 1092.1,1817.23 1092.1,3582.1 v1(1305,3795) ; v1(1385,3925) 1523,3925 1598,4000 1650,4000 1680,4030 1830,4030 1892.41,3967.59 v1(1892.41,3951.68) ; U8.17@2301.38,4396.77 2393.02,4396.77 2424.9,4364.9 2424.9,4348.98 2358,4282.08 2358,4214.67 2379.67,4193 2412,4193 v1(2455,4150) ; v1(2345,4060) 2369,4036 2369,3729.47 2471.57,3626.9 2512.71,3626.9 2551.9,3587.71 2551.9,3585.98 2783.88,3354 2974.08,3354 3052.1,3275.98 3052.1,3246.37 3085,3213.47 U14.26@3085,3160
  Bottom Layer w10: v1(1305,3795) 1385,3875 v1(1385,3925) ; v1(1892.41,3951.68) 2236.68,3951.68 v1(2345,4060) 2365,4060 v1(2455,4150) ; U14.26@3085,3160 3103.24,3160 3136.14,3127.1 3478.63,3127.1 3511.53,3160 U18.26@3765,3160
A10: J1.33 U8.16 U12.2 U14.23 U18.23 | length 6343.3
  Top Layer w10: U12.2@1600,1615 1600,1861.4 1637.9,1899.3 1637.9,1937.9 1884.91,2184.91 1884.91,2302.03 1944.88,2362 2367.04,2362 2402.14,2326.9 2512.71,2326.9 2577.61,2262 2682.04,2262 2719.04,2225 3110.96,2225 3133,2247.04 3133,2812 U14.23@3085,2860 3085,2913.47 3018.1,2980.37 3018.1,3261.9 2960,3320 2769.79,3320 2517.9,3571.89 2517.9,3573.63 2498.63,3592.9 2457.49,3592.9 2335,3715.39 2335,3993.63 2265,4063.63 2265,4130 2310,4175 v1(2310,4185) ; U8.16@2301.38,4422.36 2391.47,4422.36 2442,4371.83 2442,4342.04 2395,4295.04 v1(2395,4230)
  Bottom Layer w10: J1.33@1135,1835 1140,1835 1195,1780 1266.76,1780 1469.66,1577.1 1530.34,1577.1 1568.24,1615 U12.2@1600,1615 ; v1(2310,4185) 2350,4185 v1(2395,4230) ; U14.23@3085,2860 3125.96,2860 3157.96,2892 3357.04,2892 3421.94,2827.1 3478.63,2827.1 3511.53,2860 U18.23@3765,2860
A11: J1.36 U8.15 U12.14 U14.25 U18.25 | length 6353.4
  Top Layer w10: U12.14@1700,1915 1700,1975.96 1901.91,2177.87 1901.91,2294.99 1951.92,2345 2360,2345 2395.1,2309.9 2505.67,2309.9 2534.9,2280.67 2534.9,2263.57 2553.47,2245 2675,2245 2712,2208 3118,2208 3150,2240 3150,2890 3117.9,2922.1 3117.9,2973.63 3085,3006.53 U14.25@3085,3060 3085,3113.47 3035.1,3163.37 3035.1,3268.94 2967.04,3337 2776.83,3337 2534.9,3578.93 2534.9,3580.67 2505.67,3609.9 2464.53,3609.9 2352,3722.43 2352,4000.67 2308,4044.67 2308,4099.67 v1(2348.33,4140) ; U8.15@2301.38,4447.95 2389.92,4447.95 2459,4378.88 2459,4335 2418,4294 2418,4259.67 2455,4222.67 v1(2455,4215) v1@2432.63,4215
  Bottom Layer w10: J1.36@1235,1735 1457.9,1512.1 1550.7,1512.1 1637.9,1599.3 1637.9,1852.9 U12.14@1700,1915 ; v1(2348.33,4140) 2348.33,4127.72 2435.61,4215 v1(2455,4215) ; U14.25@3085,3060 3103.24,3060 3136.14,3027.1 3478.63,3027.1 3511.53,3060 U18.25@3765,3060
A12: U8.14 U12.5 U14.4 U18.4 | length 5060.8
  Top Layer w10: U12.5@1900,1615 1942.43,1615 1983,1655.57 1983,1692.04 2168.06,1877.1 2208.63,1877.1 2232.9,1901.37 2232.9,1921.94 2311.96,2001 2322.37,2001 2354,2032.63 2354,2043.04 2410.96,2100 v1(2595,2100) ; v1(2190,4165) 2190,4090.55 2301,3979.55 2301,3701.31 2452.1,3550.21 2452.1,3546.37 2485,3513.47 U14.4@2485,3460 2605.75,3460 2775,3290.75 2775,2775 v1(2765,2765) ; U8.14@2301.38,4473.54 2301.77,4473.94 2387.98,4473.94 2476,4385.92 2476,4296 v1(2455,4275) ; v1(2765,2355) v1(2765,2565)
  Bottom Layer w10: v1(2190,4165) 2205,4165 2315,4275 v1(2455,4275) ; U14.4@2485,3460 2560.96,3460 2622.96,3522 2966.31,3522 2995.41,3492.9 3098.63,3492.9 3131.53,3460 U18.4@3465,3460 ; v1(2595,2100) 2765,2270 v1(2765,2355) ; v1(2765,2565) v1(2765,2765)
A13: U8.13 U12.11 U14.28 U18.28 | length 5440.1
  Top Layer w10: U12.11@2000,1915 2037.9,1952.9 2215.7,1952.9 2217.06,1951.54 2238.46,1951.54 2304.92,2018 2315.33,2018 2337,2039.67 2337,2050.08 2426.92,2140 3285.21,2140 3410,2264.79 3410,2560 3442.9,2592.9 3478.63,2592.9 3488.53,2583 3596.08,2583 3715,2701.92 3715,2730.96 3655,2790.96 3655,3250 U18.28@3765,3360 ; U8.13@2301.38,4499.13 2386.82,4499.13 2493,4392.96 2493,4135.67 2403,4045.67 2403,3752.96 2445.86,3710.1 2505.47,3710.1 2534.9,3680.67 2534.9,3652.79 2585.9,3601.79 2585.9,3600.06 2797.96,3388 3057,3388 U14.28@3085,3360
  Bottom Layer w10: U14.28@3085,3360 3103.24,3360 3136.14,3327.1 3478.63,3327.1 3511.53,3360 U18.28@3765,3360
A14: U8.12 U14.29 U16.2 U18.3 | length 5000.1
  Top Layer w10: U8.12@2301.38,4524.72 2301.65,4525 2385,4525 2510,4400 2510,4128.63 2420,4038.63 2420,3760 2430,3750 2436.76,3750 2459.66,3727.1 2512.51,3727.1 2551.9,3687.71 2551.9,3659.84 2602.9,3608.84 2602.9,3607.1 2785,3425 v1(2820,3425) 2840,3405 3030,3405 U14.29@3085,3460 ; v1(2590,1990) 2612.33,1990 2717.33,2095 v1(2730,2095) ; v1(2820,3280) 2822,3278 v1(2822,2768) ; v1(2822,2569.5) 2822,2560.33 2837.61,2544.72 v1(2837.61,2358)
  Bottom Layer w7: U14.29@3085,3460 3109.61,3460 3125.11,3444.5 3436.09,3444.5 3451.99,3428.6 3478.01,3428.6 3568.91,3519.5 3646.42,3519.5 3755.52,3628.6 3778.01,3628.6 3796.4,3646.99 3796.4,3673.01 3778.01,3691.4 3751.99,3691.4 3733.6,3673.01 3733.6,3650.52 3643.08,3560 U18.3@3465,3560
  Bottom Layer w10: U16.2@2545,1615 2545,1861.4 2582.9,1899.3 2582.9,1972.9 2590,1980 v1(2590,1990) ; v1(2730,2095) 2842,2207 2842,2353.61 v1(2837.61,2358) ; v1(2820,3280) v1(2820,3425) ; v1(2822,2569.5) v1(2822,2768)
A15: U8.11 U14.3 U16.14 U18.31 | length 4596.5
  Top Layer w10: v1(2160,4280) 2160,4247.67 2245,4162.67 2245,4059.59 2318,3986.59 2318,3708.35 2466.35,3560 U14.3@2485,3560 ; v1(2200,4395) 2200,4510 2240.32,4550.32 U8.11@2301.38,4550.32 ; U16.14@2645,1915 2655,1915 2708,1968 v1(2708,1968.35) ; v1(2805,1990) 2912,2097 v1(2912,2103) ; v1(3191.9,2328) 3191.9,2360.98 3179,2373.88 3179,3375.56 3310,3506.56 v1(3310,3545)
  Bottom Layer w10: v1(2160,4280) 2160,4355 v1(2200,4395) ; U14.3@2485,3560 3038.47,3560 3071.37,3527.1 3098.63,3527.1 3116.53,3545 v1(3310,3545) 3433.47,3545 3451.37,3527.1 3478.63,3527.1 3486.53,3535 3640,3535 U18.31@3765,3660 ; v1(2708,1968.35) 2768.35,1968.35 2790,1990 v1(2805,1990) ; v1(2912,2103) 2974.53,2103 3191.9,2320.37 v1(3191.9,2328)
A16: U10.16 U14.2 U16.5 U18.2 | length 5235.5
  Top Layer w7: v1(3920,3800) 4024.8,3800 4205.3,3619.5 4469.5,3619.5 4465,3615 v1(4455,3615) ; v1(4865,3565) 4865,3690 4872.64,3697.64 U10.16@4938.62,3697.64
  Top Layer w10: U16.5@2845,1615 2910,1680 2910,1872.2 2882.9,1899.3 2882.9,2021.57 2961.33,2100 v1(3025,2100) ; v1(3195,2265) 3195,2278.77 3228.9,2312.67 3228.9,2348.02 3196,2380.92 3196,3368.51 3347,3519.51 3347,3542 U18.2@3465,3660
  Bottom Layer w7: U18.2@3465,3660 3700.79,3660 3746.19,3705.4 3754.81,3705.4 3809.5,3760.09 3809.5,3774.7 3830.3,3795.5 3919.3,3795.5 3920,3794.8 v1(3920,3800) ; v1(4455,3615) 4475,3615 4570,3520 4760,3520 4805,3565 v1(4865,3565)
  Bottom Layer w10: U14.2@2485,3660 3038.47,3660 3071.37,3692.9 3098.63,3692.9 3117.9,3673.63 3117.9,3672.1 3130,3660 U18.2@3465,3660 ; v1(3025,2100) 3190,2265 v1(3195,2265)
A17: U10.17 U14.30 U16.11 U18.1 | length 4500.9
  Top Layer w7: v1(3800,3510) 3805.5,3504.5 4329.5,3504.5 v1(4390,3565) ; v1(4824.8,3605.41) 4825,3605.61 4825,3670 4878.23,3723.23 U10.17@4938.62,3723.23
  Top Layer w10: U16.11@2945,1915 2945,2040 2970,2065 3007.67,2065 3009.67,2063 3040.33,2063 3080.33,2103 v1(3082,2103) ; U14.30@3085,3560 3117.9,3592.9 3117.9,3670 3207.9,3760 U18.1@3465,3760 3465,3750 3497.9,3717.1 3497.9,3646.37 ; v1(3255,2285) 3255,2345.96 3213,2387.96 3213,3361.47 3497.9,3646.37 ; v1(3595,3475) 3497.9,3572.1 3497.9,3646.37
  Bottom Layer w7: v1(3595,3475) 3625.5,3505.5 3795.5,3505.5 v1(3800,3510) ; v1(4390,3565) 4419.5,3594.5 4419.5,3629.7 4440.3,3650.5 4469.7,3650.5 4490.5,3629.7 4490.5,3619.3 4575.8,3534 4753.39,3534 v1(4824.8,3605.41)
  Bottom Layer w10: v1(3082,2103) 3085.33,2103 3245,2262.67 3245,2275 v1(3255,2285)
A18: U10.18 U17.2 | length 3586.3
  Top Layer w10: v1(3665,1975) 3690,2000 3690,2165 3725,2200 v1(3825,2200) ; v1(4215,2305) 4265,2305 4385,2425 v1(4385,2600) ; v1(4255,3220) 4398,3363 4398,3385.33 4472.22,3459.54 v1(4654.54,3459.54) ; U10.18@4938.62,3748.82 5063.82,3748.82 5110,3702.64 v1(5110,3625)
  Bottom Layer w10: U17.2@3495,1615 3495,1646.08 3564.5,1715.58 3564.5,1830.9 3632.9,1899.3 3632.9,1942.9 v1(3665,1975) ; v1(3825,2200) 3925,2300 4210,2300 v1(4215,2305) ; v1(4255,3220) 4385,3090 v1(4385,2600) ; v1(4654.54,3459.54) 4944.54,3459.54 v1(5110,3625)
A19: U10.19
AGND: C33.1 C34.1 C35.1 C36.1 C37.1 C38.1 C39.1 C41.1 C46.2 C47.2 C48.2 C49.2 pad.0@8170.47,1135 pad.26@7240,2230 pad.26@7340,2230 R41.1 R56.1 U23.7 U24.18 U24.21 U24.25 U25.7 | length 23287.5
  Top Layer w8: U24.18@6605,1327.99 6605,1460 6655.47,1510.47 C39.1@7275,1510.47 ; 6715,1180 6755,1220 U24.21@6755,1327.99 ; U24.25@6955,1327.99 6955,1250 6970,1235 v1(6970,1180) ; U25.7@8697.2,2763.46 8702.99,2763.46 C34.1@8780,2840.47 ; U23.7@9162.2,2763.46 9162.2,2887.2 9179.53,2904.53 C33.1@9240,2904.53
  Top Layer w30: v1(1470,6220) 1065.1,5815.1 1065.1,1491.05 1486.15,1070 4550,1070 4770,1290 4770,1420 4870,1520 5440,1520 5503.91,1456.09 5503.91,1158.82 5582.72,1080 8145,1080 8170.47,1105.47 C47.2@8170.47,1220 C49.2@8170.47,1405 C48.2@8170.47,1590 8170,1590.47 v1(8170,1670) ; v1(1570,6220) 2395,6220 2446.5,6168.5 R41.1@2446.5,6115 ; v1(6275,1880) 6320.47,1834.53 C41.1@6320.47,1820 ; v1(6445,1820) C37.1@6605.47,1820 6605.47,1854.53 6605,1855 6625,1875 6880.47,1875 C38.1@6935.47,1820 6949.97,1834.5 6949.97,1870.46 6985.93,1870.46 7100.47,1985 v1(7275,1985) ; C36.1@6689.53,1180 6715,1180 v1(6770,1180) ; C46.2@6904.53,1185 6909.53,1180 v1(6970,1180) 7224.53,1180 C35.1@7260,1215.47 7305.47,1215.47 7325,1235 7325,1460.47 C39.1@7275,1510.47 ; pad.26@7240,2230 pad.26@7340,2230 v1(7805,2695) ; v1@7580,2436.5 R56.1@7940,2436.5 ; v1(7884.9,3016.1) 7986.1,3016.1 8200,3230 v1(8335,3230) ; v1(8450,3230) 8452,3232 9111.18,3232 9240,3103.18 C33.1@9240,2904.53
  Bottom Layer w30: v1(1470,6220) v1(1570,6220) ; v1(6275,1880) 6385,1880 v1(6445,1820) ; v1(6770,1180) v1(6970,1180) ; v1(7275,1985) 7297.5,2007.5 7375.68,2007.5 7575,2206.82 7575,2440 v1(7580,2445) ; v1(7805,2695) 7805,2936.2 v1(7884.9,3016.1) ; 8158,2568 7809.32,2219.32 7809.32,1815 7954.32,1670 v1(8170,1670) ; v1(8335,3230) v1(8450,3230)
ALE: U3.37 U11.16 | length 2249.6
  Top Layer w10: U11.16@5343.62,4127.64 5477.93,4127.64 5696.36,3909.2 5696.36,3885.64 v1(5735,3847) ; v1(5433,3025) 5452.33,3025 5507,3079.67 5507,3202 v1(5510,3205)
  Bottom Layer w10: U3.37@5325,2300 5433,2408 v1(5433,3025) ; v1(5510,3205) 5510,3210 5735,3435 v1(5735,3847)
CLK: U3.11 U11.18 U27.1 | length 7104.6
  Top Layer w10: U3.11@4625,2200 4632.1,2200 4670,2237.9 5092.9,2237.9 5200,2345 5420,2345 5480,2405 v1(5480,2860) ; v1(4715,5935) 4717.9,5932.1 5042.9,5932.1 5605,5370 v1(5605,4225) ; U11.18@5343.62,4178.82 5506.18,4178.82 v1(5520,4165) ; v1(5470,3095) 5470,3990 v1(5480,4000)
  Bottom Layer w10: U27.1@2950,5840 3014.5,5904.5 4016.42,5904.5 4064.46,5952.54 4697.46,5952.54 v1(4715,5935) ; v1(5470,3095) 5470,2870 v1(5480,2860) ; v1(5480,4000) 5480,4125 v1(5520,4165) 5530,4175 5555,4175 v1(5605,4225)
CPU_A8: U8.2 U9.16 | length 509.2
  Top Layer w10: U8.2@2575,4345.59 2575,4342.1 3027.1,4342.1 U9.16@3065,4380
CPU_A9: U8.3 U9.14 | length 535.1
  Top Layer w10: U8.3@2575,4371.18 2902.58,4371.18 2949.3,4417.9 3002.9,4417.9 U9.14@3065,4480
CPU_A10: U8.4 U9.12 | length 597.3
  Top Layer w10: U8.4@2575,4396.77 2881.77,4396.77 2927.1,4442.1 2980.7,4442.1 3002.9,4464.3 3002.9,4517.9 U9.12@3065,4580
CPU_A11: U8.5 U9.10 | length 638.7
  Top Layer w10: U8.5@2575,4422.36 2852.36,4422.36 2947.9,4517.9 2974.62,4517.9 3003.36,4546.64 3003.36,4618.36 U9.10@3065,4680
CPU_A12: U8.6 U9.7 | length 624.2
  Top Layer w10: U8.6@2575,4447.95 2797.95,4447.95 2870,4520 2870,4685 U9.7@2965,4780
CPU_A13: U8.7 U9.5 | length 697
  Top Layer w10: U8.7@2575,4473.54 2795.26,4473.54 2850,4528.28 2850,4765 U9.5@2965,4880
CPU_A14: U8.8 U9.3 | length 769.9
  Top Layer w10: U8.8@2575,4499.13 2792.57,4499.13 2830,4536.57 2830,4845 U9.3@2965,4980
CPU_A15: U8.9 U9.1 | length 842.7
  Top Layer w10: U8.9@2575,4524.72 2789.87,4524.72 2810,4544.85 2810,4925 U9.1@2965,5080
CPU_A16: U9.68 U10.5 | length 2687.7
  Top Layer w10: v1(3190,5010) 3167.9,4987.9 3167.9,4579.98 3352.88,4395 3775,4395 3793.1,4376.9 3793.1,4350.22 3827.1,4316.22 3827.1,4264.3 3851.4,4240 3858.6,4240 3902.9,4195.7 3902.9,4002.65 4182.14,3723.41 4236.59,3723.41 4262.36,3697.64 U10.5@4665,3697.64
  Bottom Layer w10: U9.68@3065,5180 3065,5135 3127.1,5072.9 3127.1,5064.3 3181.4,5010 v1(3190,5010)
CPU_A17: U9.67 U10.4 | length 2563.9
  Top Layer w10: U9.67@3165,5080 3172.33,5080 3227,5025.33 3227,4981.18 3184.9,4939.08 3184.9,4587.02 3359.92,4412 3788,4412 3810.1,4389.9 3810.1,4357.26 3842.26,4325.1 3888.72,4325.1 3905,4308.82 3905,4217.64 3919.9,4202.74 3919.9,4009.69 4189.18,3740.41 4243.63,3740.41 4260.81,3723.23 U10.4@4665,3723.23
CPU_A18: U9.66 U10.3 | length 2635.5
  Top Layer w10: U9.66@3165,5180 3223.18,5121.82 3223.18,5053.18 3244,5032.37 3244,4974.14 3201.9,4932.04 3201.9,4594.06 3366.96,4429 3796,4429 3827.1,4397.9 3827.1,4364.3 3849.3,4342.1 3895.76,4342.1 3922,4315.86 3922,4224.68 3936.9,4209.78 3936.9,4016.73 4196.22,3757.41 4250.67,3757.41 4259.26,3748.82 U10.3@4665,3748.82
CPU_A19: U9.65 U10.2 | length 2536.6
  Top Layer w10: U9.65@3265,5080 3261,5076 3261,4967.1 3218.9,4925 3218.9,4601.1 3374,4446 3804,4446 3832.1,4417.9 3880.7,4417.9 3902.9,4395.7 3902.9,4360.18 3914.7,4348.38 3914.7,4347.2 3944,4317.9 3980.7,4317.9 4002.9,4295.7 4002.9,4259 3953.9,4210 3953.9,4023.77 4203.26,3774.41 U10.2@4665,3774.41
CPU_AD0: U2.2 U4.9 U9.17 | length 1776.1
  Top Layer w7: v1(1705,4420) 1725.28,4399.72 U4.9@1725.28,4155
  Bottom Layer w7: v1(1705,4420) 1711.95,4426.95 1761.95,4426.95 1831.41,4357.5 1892.7,4357.5 1933.2,4398 2012,4398 2131,4517 2808,4517 2928.6,4396.4 2928.6,4364.92 2965,4328.52 U9.17@2965,4280
CPU_AD1: U2.3 U4.8 U9.15 | length 1697.6
  Top Layer w7: v1(1750,4465) 1750,4306.18 U2.3@1751.18,4305 1751.18,4155.31 U4.8@1750.87,4155
  Bottom Layer w7: v1(1750,4465) 1750,4458.71 1837.21,4371.5 1886.9,4371.5 1925.8,4410.4 1925.8,4412 2006.2,4412 2125.2,4531 2814,4531 U9.15@2965,4380
CPU_AD2: U2.4 U4.7 U9.13 | length 1592
  Top Layer w7: U4.7@1776.46,4155 1776.46,4411.67 v1(1811.85,4447.06)
  Bottom Layer w7: v1(1811.85,4447.06) 1811.85,4425.34 1851.69,4385.5 1881.1,4385.5 1901.9,4406.3 1901.9,4407.9 1920,4426 2000.4,4426 2119.4,4545 2900,4545 U9.13@2965,4480